# Altium PCB Input Cover Flex.PcbDoc
Units mil, origin at the board's own origin, x right, y up, seen from the top; angles counter-clockwise.
Board outline 1413.39 x 1384.84 mil, 2 copper layers (Top Layer, Bottom Layer); 2 components, 50 nets, 100 pads, 100 vias.
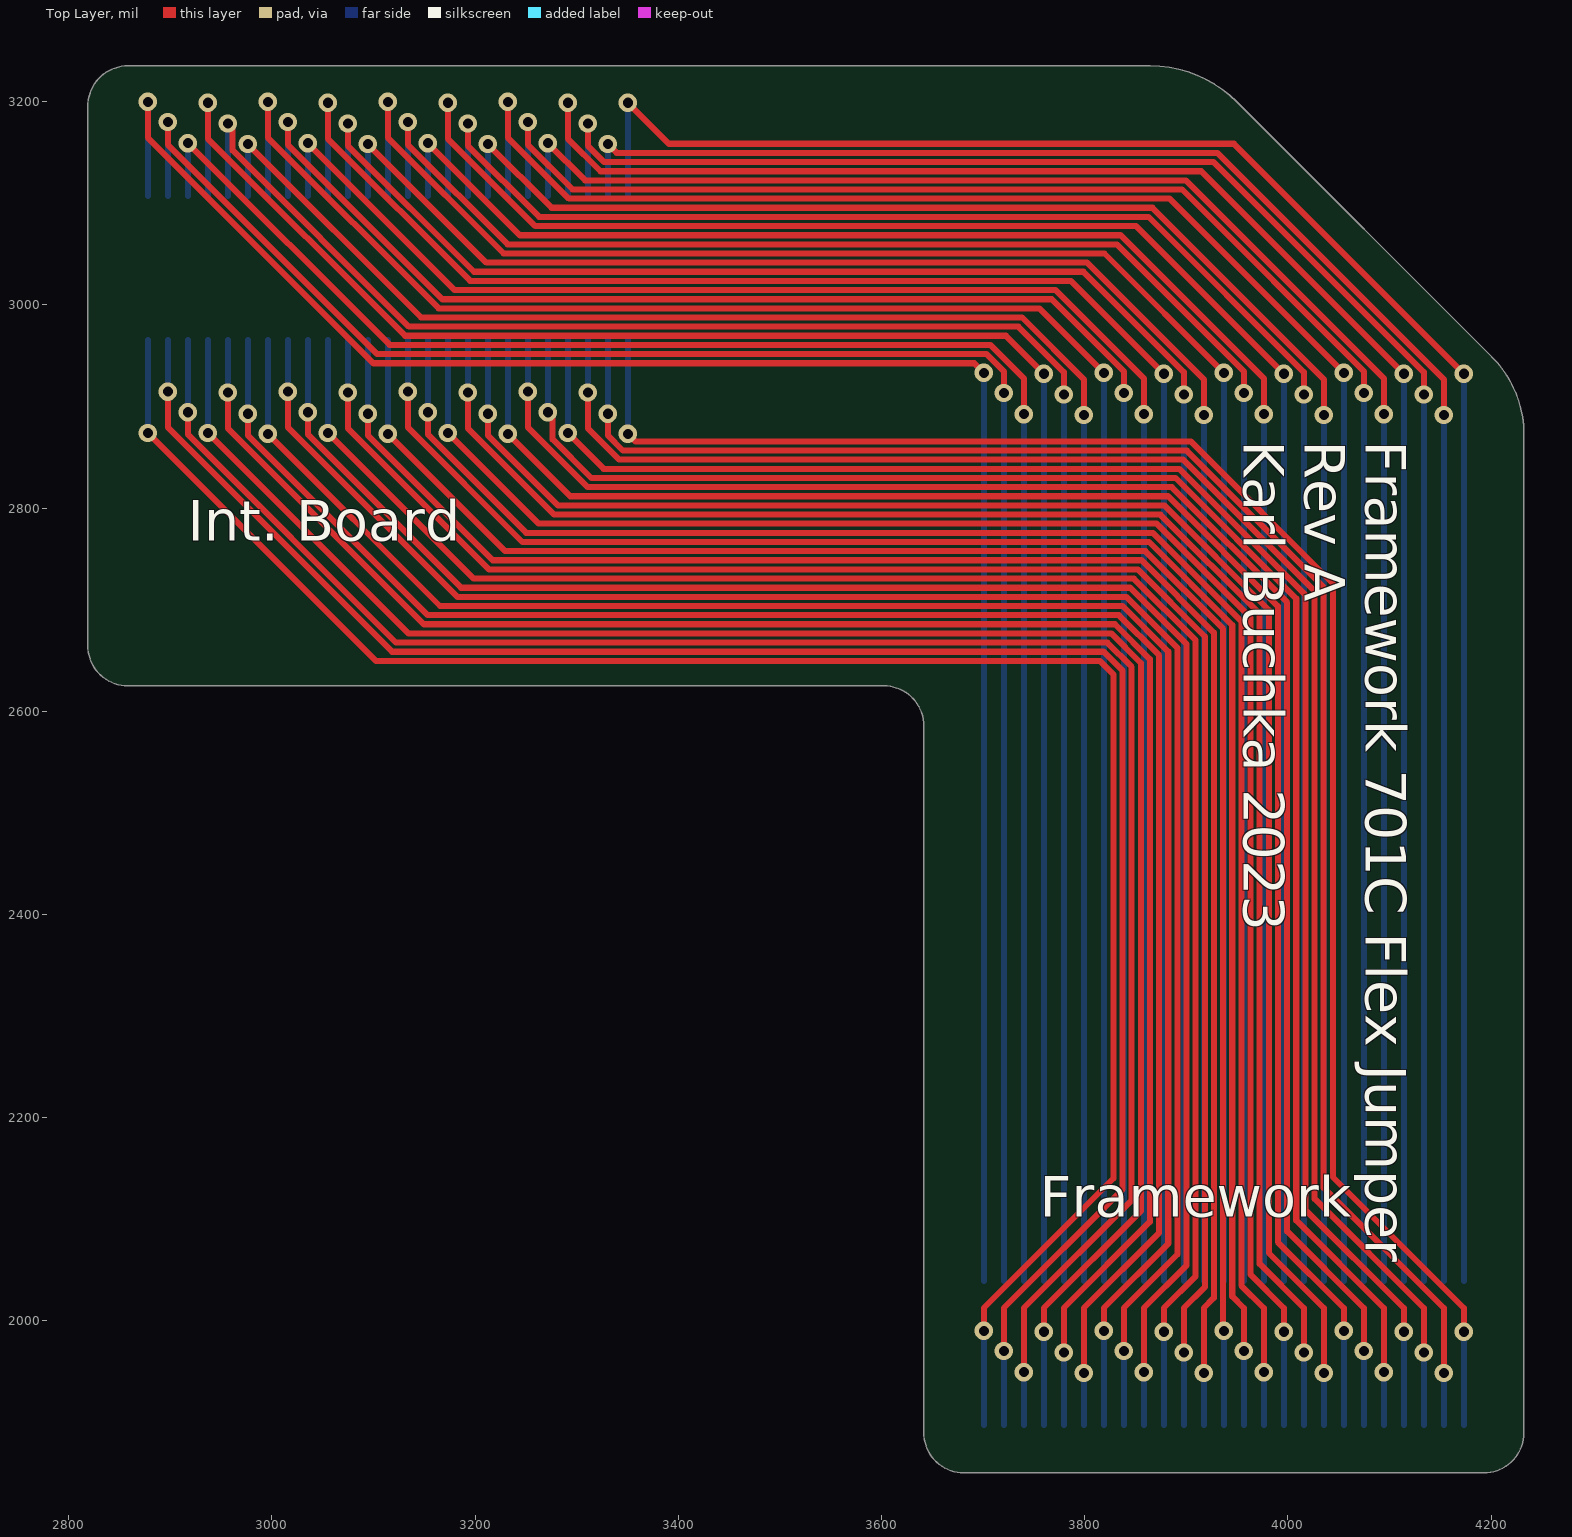
[diagram p0: Top Layer view]
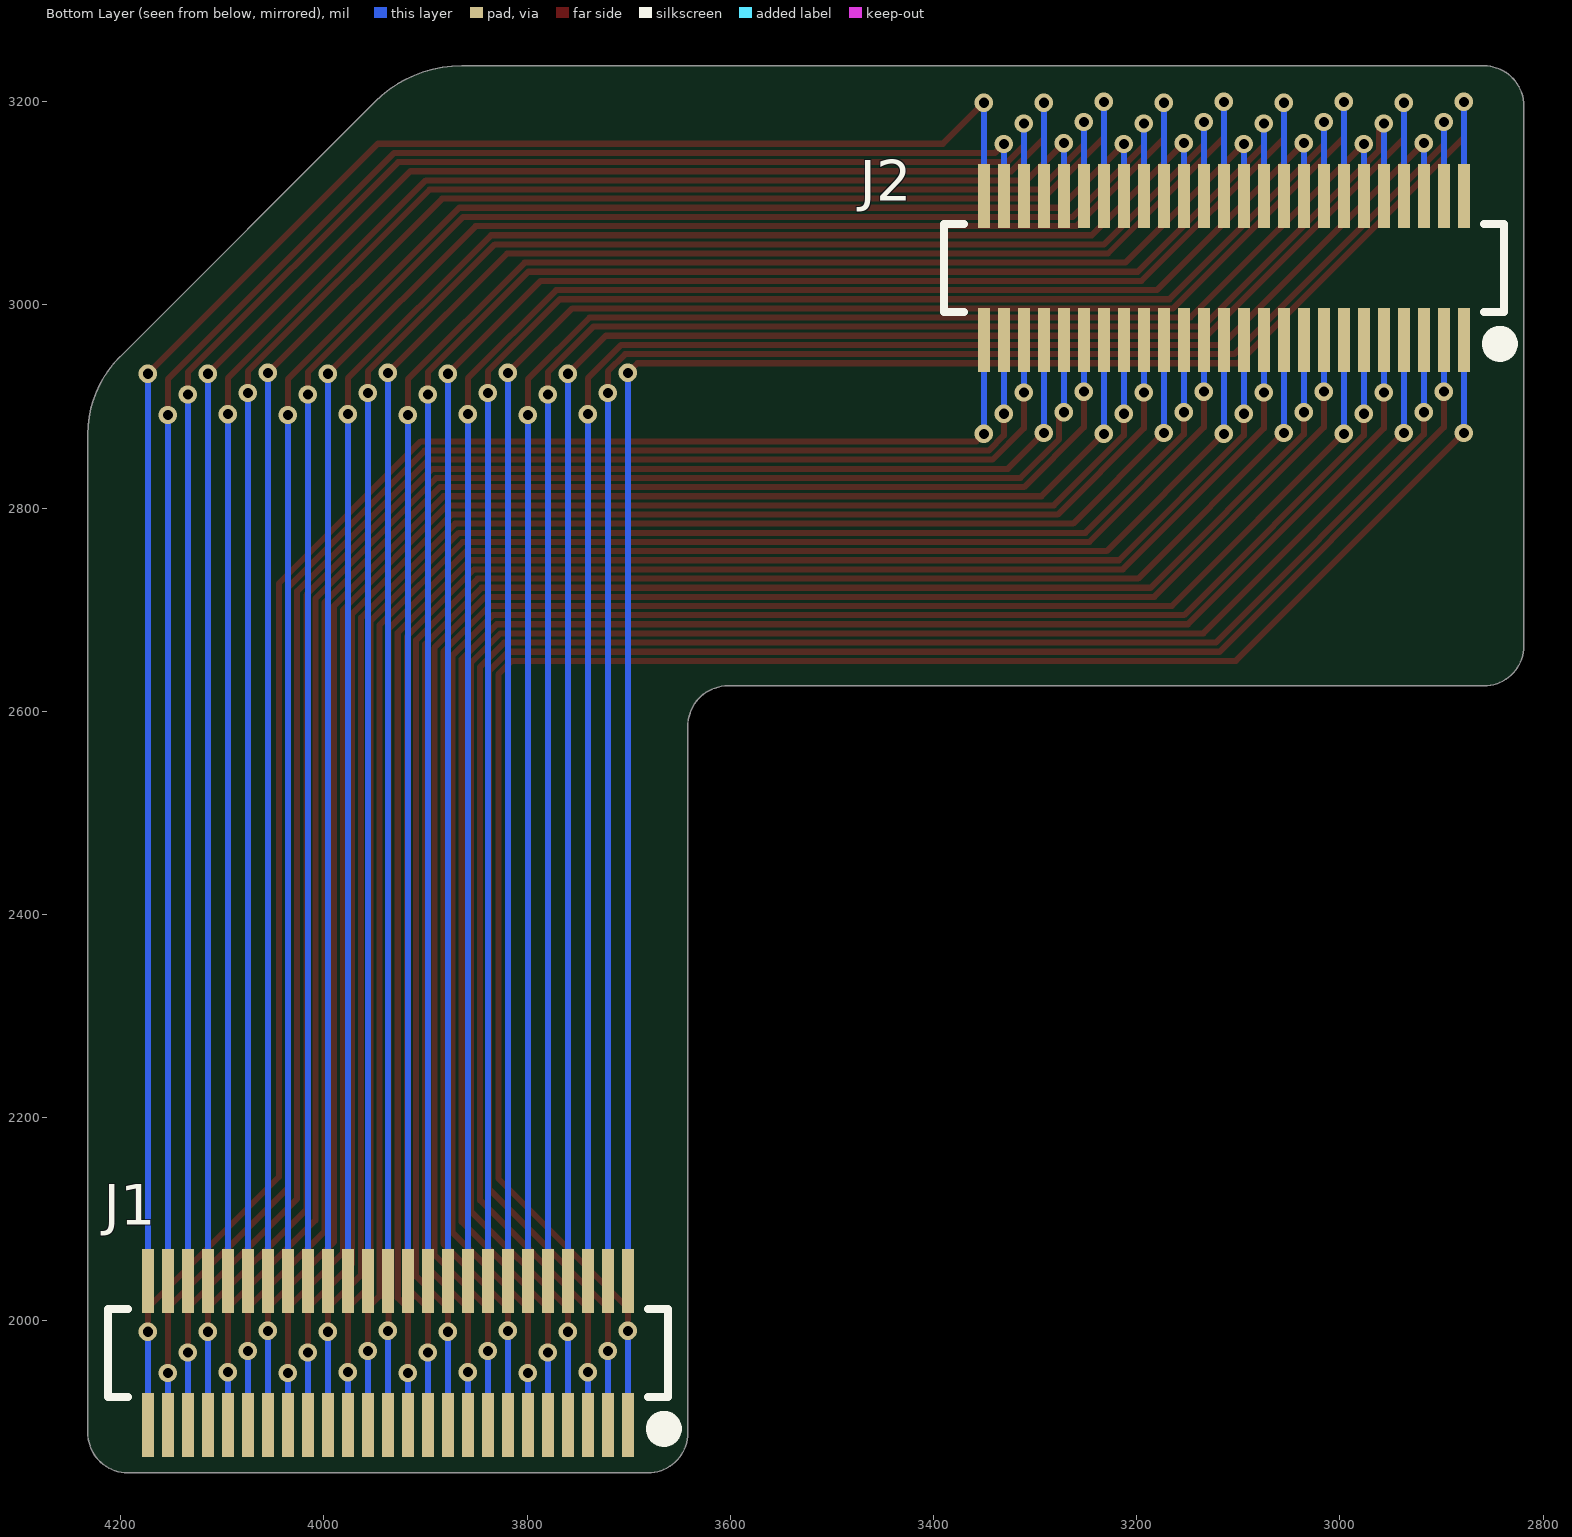
[diagram p1: Bottom Layer view, seen from below]

## Layer stack, top to bottom
Top Solder: solder mask 0.4, Solder Resist, Dk 3.5
Top Layer: signal copper 1.4
Dielectric 1: dielectric 12.6, FR-4, Dk 4.8
Bottom Layer: signal copper 1.4
Bottom Solder: solder mask 0.4, Solder Resist, Dk 3.5

## Board outline
2818.9,2664.37 ccw(c2858.27,2664.37) 2858.27,2625 3602.36,2625 cw(c3602.36,2585.63) 3641.73,2585.63 3641.73,1889.76 ccw(c3681.1,1889.76) 3681.1,1850.39 4192.91,1850.39 ccw(c4192.91,1889.76) 4232.28,1889.76 4232.28,2872.78 ccw(c4124.75,2872.78) 4200.79,2948.82 3949.73,3199.88 ccw(c3864.37,3114.53) 3864.37,3235.24 2858.27,3235.24 ccw(c2858.27,3195.87) 2818.9,3195.87

## Design rules (kind name [scope] priority, off if disabled: settings)
Clearance [All] p1: gap=3 ignorepadtopadclearanceinfootprint=FALSE
PolygonConnect [All] p1: connectstyle=Relief reliefconductorwidth=10 reliefentries=4 polygonreliefangle="90 Angle" airgapwidth=10
RoomDefinition "Input Cover Flex" [InComponentClass('Input Cover Flex')] p1 off: confinementstyle=ConfineIn formatcopy=TRUE lockcomponents=FALSE outline 1109.13,1088.78 6595,1088.78 6595,4325 1109.13,4325
RoutingVias [All] p1: holewidth=8 width=16 viastyle="Through Hole" minholewidth=6 minwidth=14 maxholewidth=10 maxwidth=18
SolderMaskExpansion [All] p1: expansion=4
Width [All] p1: maxlimit=10 minlimit=6 preferedwidth=8 minimp=50.000000 maximp=50.000000 favimp=50.000000
30 further rules are at their usual default settings.

## Components (designator, comment, footprint, x,y, rotation, side; value= is the part's Value field where it differs from the comment)
J1 "10156001-051100LF" 10156001-051100LF 3937.01,1968.5 r0 bottom
J2 "10156001-051100LF" 10156001-051100LF 3114.17,3036.42 r0 bottom

## Footprints (in the part's own frame and the unit in brackets; to place one, negate y for a bottom-side part, rotate by r counter-clockwise, add the part's x,y. Pads: shape width x height; smd on the part's side, far side on the other; paste and mask are expansions set on the pad)
10156001-051100LF [mm]
  rect 0.3x1.6 smd: 1(-6,1.8) 2(-6,-1.8) 3(-5.5,1.8) 4(-5.5,-1.8) 5(-5,1.8) 6(-5,-1.8) 7(-4.5,1.8) 8(-4.5,-1.8) 9(-4,1.8) 10(-4,-1.8) 11(-3.5,1.8) 12(-3.5,-1.8) 13(-3,1.8) 14(-3,-1.8) 15(-2.5,1.8) 16(-2.5,-1.8) 17(-2,1.8) 18(-2,-1.8) 19(-1.5,1.8) 20(-1.5,-1.8) 21(-1,1.8) 22(-1,-1.8) 23(-0.5,1.8) 24(-0.5,-1.8) 25(0,1.8) 26(0,-1.8) 27(0.5,1.8) 28(0.5,-1.8) 29(1,1.8) 30(1,-1.8) 31(1.5,1.8) 32(1.5,-1.8) 33(2,1.8) 34(2,-1.8) 35(2.5,1.8) 36(2.5,-1.8) 37(3,1.8) 38(3,-1.8) 39(3.5,1.8) 40(3.5,-1.8) 41(4,1.8) 42(4,-1.8) 43(4.5,1.8) 44(4.5,-1.8) 45(5,1.8) 46(5,-1.8) 47(5.5,1.8) 48(5.5,-1.8) 49(6,1.8) 50(6,-1.8)
  silkscreen extent -7.1,-1.1 7,2.1, body extent -7.17,-2.3 7.17,2.3, height 2.79

## Via types
v1: diameter 18, hole 10, Top Layer to Bottom Layer, 100 vias

## Nets (pads, with @x,y where several pads share a name; then routed paths per layer and width w, separated by ;. In a path a pad name is that pad's centre, name@x,y a point inside that pad or via, vN(x,y) a via of type N, cw(c..) or ccw(c..) an arc to the next point about the centre after c; other vN are vias at no path point)
5VALW: J1.39 J2.39 | length 1745.6
  Top Layer w6: v1(3251.97,2914.61) 3251.97,2879.41 3310.77,2820.61 3885.79,2820.61 3999.27,2707.13 3999.27,2088.17 4074.8,2012.64 v1(4074.8,1970.43)
  Bottom Layer w6: v1(3251.97,2914.61) J2.39 ; J1.39 v1(4074.8,1970.43)
5VS: J1.38 J2.38 | length 1940.2
  Top Layer w6: v1(3232.28,3199.8) 3232.28,3164.6 3292.33,3104.55 3883.64,3104.55 v1(4055.12,2933.07)
  Bottom Layer w6: J2.38 v1(3232.28,3199.8) ; J1.38 v1(4055.12,2933.07)
CAPS_N: J1.28 J2.28 | length 1905.7
  Top Layer w6: v1(3133.86,3180.08) 3133.86,3157.64 3231.95,3059.55 3831.74,3059.55 3956.69,2934.6 v1(3956.69,2913.35)
  Bottom Layer w6: J2.28 v1(3133.86,3180.08) ; J1.28 3956.69,2699.37 v1(3956.69,2913.35)
CAPS_P: J1.27 J2.27 | length 1770
  Top Layer w6: v1(3133.86,2914.61) 3133.86,2879.41 3246.66,2766.61 3863.42,2766.61 3945.27,2684.76 3945.27,2024.06 3956.69,2012.64 v1(3956.69,1970.43)
  Bottom Layer w6: v1(3133.86,2914.61) J2.27 ; J1.27 v1(3956.69,1970.43)
FPR_CTRL: J1.43 J2.43 | length 1740.6
  Top Layer w6: v1(3291.34,2873.98) 3326.71,2838.61 3893.25,2838.61 4017.27,2714.59 4017.27,2109.54 4114.17,2012.64 v1(4114.17,1989.21)
  Bottom Layer w6: v1(3291.34,2873.98) J2.43 ; J1.43 v1(4114.17,1989.21)
FPR_LED_COM: J1.48 J2.48 | length 1857
  Top Layer w6: v1(3330.71,3158.23) 3339.39,3149.55 3930.69,3149.55 4153.54,2926.7 v1(4153.54,2891.5)
  Bottom Layer w6: J2.48 v1(3330.71,3158.23) ; J1.48 v1(4153.54,2891.5)
FPR_LED_G: J1.47 J2.47 | length 1733.9
  Top Layer w6: v1(3330.71,2892.76) 3330.71,2871.5 3345.61,2856.61 3900.7,2856.61 4035.27,2722.04 4035.27,2130.91 4153.54,2012.64 v1(4153.54,1948.58)
  Bottom Layer w6: v1(3330.71,2892.76) J2.47 ; J1.47 v1(4153.54,1948.58)
FPR_LED_R: J1.45 J2.45 | length 1733.9
  Top Layer w6: v1(3311.02,2913.66) 3311.02,2878.46 3341.88,2847.61 3896.97,2847.61 4026.27,2718.31 4026.27,2120.23 4133.86,2012.64 v1(4133.86,1968.9)
  Bottom Layer w6: v1(3311.02,2913.66) J2.45 ; J1.45 v1(4133.86,1968.9)
FPR_LED_W: J1.46 J2.46 | length 1902.6
  Top Layer w6: v1(3311.02,3178.54) 3311.02,3156.7 3327.17,3140.55 3926.96,3140.55 4133.86,2933.65 v1(4133.86,2911.81)
  Bottom Layer w6: J2.46 v1(3311.02,3178.54) ; J1.46 v1(4133.86,2911.81)
GND1: J1.26 J2.26 | length 1940.2
  Top Layer w6: v1(3114.17,3199.8) 3114.17,3164.6 3228.22,3050.55 3819.53,3050.55 v1(3937.01,2933.07)
  Bottom Layer w6: J2.26 v1(3114.17,3199.8) ; J1.26 v1(3937.01,2933.07)
GND2: J1.1 J2.1 | length 1931.8
  Top Layer w6: v1(2877.95,2873.98) 3102.32,2649.61 3814.96,2649.61 3828.27,2636.3 3828.27,2140.12 3700.79,2012.64 v1(3700.79,1990.16)
  Bottom Layer w6: v1(2877.95,2873.98) J2.1 ; J1.1 v1(3700.79,1990.16)
GND3: J1.29 J2.29 | length 1770
  Top Layer w6: v1(3153.54,2894.29) 3153.54,2872.45 3250.39,2775.61 3867.15,2775.61 3954.27,2688.49 3954.27,2034.75 3976.38,2012.64 v1(3976.38,1949.53)
  Bottom Layer w6: v1(3153.54,2894.29) J2.29 ; J1.29 v1(3976.38,1949.53)
GND4: J1.31 J2.31 | length 1765.1
  Top Layer w6: v1(3173.23,2873.98) 3262.6,2784.61 3870.88,2784.61 3963.27,2692.22 3963.27,2045.43 3996.06,2012.64 v1(3996.06,1989.21)
  Bottom Layer w6: v1(3173.23,2873.98) J2.31 ; J1.31 v1(3996.06,1989.21)
GND5: J1.33 J2.33 | length 1758.4
  Top Layer w6: v1(3192.91,2913.66) 3192.91,2878.46 3277.77,2793.61 3874.61,2793.61 3972.27,2695.95 3972.27,2056.12 4015.75,2012.64 v1(4015.75,1968.9)
  Bottom Layer w6: v1(3192.91,2913.66) J2.33 ; J1.33 v1(4015.75,1968.9)
GND6: J1.41 J2.41 | length 1745.6
  Top Layer w6: v1(3271.65,2894.29) 3276.34,2889.61 3276.34,2867.76 3314.5,2829.61 3889.52,2829.61 4008.27,2710.86 4008.27,2098.86 4094.49,2012.64 v1(4094.49,1949.53)
  Bottom Layer w6: v1(3271.65,2894.29) J2.41 ; J1.41 v1(4094.49,1949.53)
GND7: J1.49 J2.49 | length 1728.9
  Top Layer w6: v1(3350.39,2873.03) 3357.82,2865.61 3904.43,2865.61 4044.27,2725.77 4044.27,2141.6 4173.23,2012.64 v1(4173.23,1989.21)
  Bottom Layer w6: v1(3350.39,2873.03) J2.49 ; J1.49 v1(4173.23,1989.21)
KBL_P_1: J1.30 J2.30 | length 1858.9
  Top Layer w6: v1(3153.54,3159.17) 3244.17,3068.55 3835.47,3068.55 3976.38,2927.64 v1(3976.38,2892.44)
  Bottom Layer w6: J2.30 v1(3153.54,3159.17) ; J1.30 v1(3976.38,2892.44)
KBL_P_2: J1.32 J2.32 | length 1938.3
  Top Layer w6: v1(3173.23,3198.86) 3173.23,3163.66 3259.33,3077.55 3850.64,3077.55 v1(3996.06,2932.13)
  Bottom Layer w6: J2.32 v1(3173.23,3198.86) ; J1.32 v1(3996.06,2932.13)
KSI0: J1.2 J2.2 | length 1940.2
  Top Layer w6: v1(2877.95,3199.8) 2877.95,3164.6 3100,2942.55 3691.31,2942.55 v1(3700.79,2933.07)
  Bottom Layer w6: J2.2 v1(2877.95,3199.8) ; J1.2 v1(3700.79,2933.07)
KSI1: J1.3 J2.3 | length 1915.7
  Top Layer w6: v1(2897.64,2914.61) 2897.64,2879.41 3118.44,2658.61 3818.69,2658.61 3837.27,2640.03 3837.27,2129.43 3720.47,2012.64 v1(3720.47,1970.43)
  Bottom Layer w6: v1(2897.64,2914.61) J2.3 ; J1.3 v1(3720.47,1970.43)
KSI2: J1.4 J2.4 | length 1905.7
  Top Layer w6: v1(2897.64,3180.08) 2897.64,3157.64 3103.73,2951.55 3703.52,2951.55 3720.47,2934.6 v1(3720.47,2913.35)
  Bottom Layer w6: J2.4 v1(2897.64,3180.08) ; J1.4 v1(3720.47,2913.35)
KSI3: J1.5 J2.5 | length 1906.8
  Top Layer w6: v1(2917.32,2894.29) 2917.32,2872.45 3122.16,2667.61 3822.42,2667.61 3846.27,2643.76 3846.27,2118.75 3740.16,2012.64 v1(3740.16,1949.53)
  Bottom Layer w6: v1(2917.32,2894.29) J2.5 ; J1.5 v1(3740.16,1949.53)
KSI4: J1.6 J2.6 | length 1858.9
  Top Layer w6: v1(2917.32,3159.17) 3115.94,2960.55 3707.25,2960.55 3740.16,2927.64 v1(3740.16,2892.44)
  Bottom Layer w6: J2.6 v1(2917.32,3159.17) ; J1.6 v1(3740.16,2892.44)
KSI5: J1.7 J2.7 | length 1893
  Top Layer w6: v1(2937.01,2873.98) 3134.38,2676.61 3826.14,2676.61 3855.27,2647.48 3855.27,2108.06 3759.84,2012.64 v1(3759.84,1989.21)
  Bottom Layer w6: v1(2937.01,2873.98) J2.7 ; J1.7 v1(3759.84,1989.21)
KSI6: J1.8 J2.8 | length 1938.3
  Top Layer w6: v1(2937.01,3198.86) 2937.01,3163.66 3131.11,2969.55 3722.42,2969.55 v1(3759.84,2932.13)
  Bottom Layer w6: J2.8 v1(2937.01,3198.86) ; J1.8 v1(3759.84,2932.13)
KSI7: J1.9 J2.9 | length 1877.5
  Top Layer w6: v1(2956.69,2913.66) 2956.69,2878.46 3149.55,2685.61 3829.87,2685.61 3864.27,2651.21 3864.27,2097.38 3779.53,2012.64 v1(3779.53,1968.9)
  Bottom Layer w6: v1(2956.69,2913.66) J2.9 ; J1.9 v1(3779.53,1968.9)
KSO0: J1.10 J2.10 | length 1902.6
  Top Layer w6: v1(2956.69,3178.54) 2961.38,3173.86 2961.38,3152.02 3134.84,2978.55 3734.63,2978.55 3779.53,2933.65 v1(3779.53,2911.81)
  Bottom Layer w6: J2.10 v1(2956.69,3178.54) ; J1.10 v1(3779.53,2911.81)
KSO1: J1.11 J2.11 | length 1868.6
  Top Layer w6: v1(2976.38,2892.76) 2976.38,2871.5 3153.27,2694.61 3833.6,2694.61 3873.27,2654.94 3873.27,2086.69 3799.21,2012.64 v1(3799.21,1948.58)
  Bottom Layer w6: v1(2976.38,2892.76) J2.11 ; J1.11 v1(3799.21,1948.58)
KSO2: J1.12 J2.12 | length 1857
  Top Layer w6: v1(2976.38,3158.23) 3147.05,2987.55 3738.36,2987.55 3799.21,2926.7 v1(3799.21,2891.5)
  Bottom Layer w6: J2.12 v1(2976.38,3158.23) ; J1.12 v1(3799.21,2891.5)
KSO3: J1.13 J2.13 | length 1854.8
  Top Layer w6: v1(2996.06,2873.03) 3165.49,2703.61 3837.33,2703.61 3882.27,2658.67 3882.27,2076.01 3818.9,2012.64 v1(3818.9,1990.16)
  Bottom Layer w6: v1(2996.06,2873.03) J2.13 ; J1.13 v1(3818.9,1990.16)
KSO4: J1.14 J2.14 | length 1940.2
  Top Layer w6: v1(2996.06,3199.8) 2996.06,3164.6 3164.11,2996.55 3755.42,2996.55 v1(3818.9,2933.07)
  Bottom Layer w6: J2.14 v1(2996.06,3199.8) ; J1.14 v1(3818.9,2933.07)
KSO5: J1.15 J2.15 | length 1838.1
  Top Layer w6: v1(3015.75,2914.61) 3015.75,2879.41 3182.55,2712.61 3841.06,2712.61 3891.27,2662.39 3891.27,2065.32 3838.58,2012.64 v1(3838.58,1970.43)
  Bottom Layer w6: v1(3015.75,2914.61) J2.15 ; J1.15 v1(3838.58,1970.43)
KSO6: J1.16 J2.16 | length 1905.7
  Top Layer w6: v1(3015.75,3180.08) 3015.75,3157.64 3167.84,3005.55 3767.63,3005.55 3838.58,2934.6 v1(3838.58,2913.35)
  Bottom Layer w6: J2.16 v1(3015.75,3180.08) ; J1.16 3838.58,2073.87 v1(3838.58,2913.35)
KSO7: J1.17 J2.17 | length 1829.3
  Top Layer w6: v1(3035.43,2894.29) 3035.43,2872.45 3186.27,2721.61 3844.78,2721.61 3900.27,2666.12 3900.27,2054.64 3858.27,2012.64 v1(3858.27,1949.53)
  Bottom Layer w6: v1(3035.43,2894.29) J2.17 ; J1.17 v1(3858.27,1949.53)
KSO8: J1.18 J2.18 | length 1858.9
  Top Layer w6: v1(3035.43,3159.17) 3180.06,3014.55 3771.36,3014.55 3858.27,2927.64 v1(3858.27,2892.44)
  Bottom Layer w6: J2.18 v1(3035.43,3159.17) ; J1.18 3858.27,2073.87 v1(3858.27,2892.44)
KSO9: J1.19 J2.19 | length 1815.5
  Top Layer w6: v1(3055.12,2873.98) 3198.49,2730.61 3848.51,2730.61 3909.27,2669.85 3909.27,2043.95 3877.95,2012.64 v1(3877.95,1989.21)
  Bottom Layer w6: v1(3055.12,2873.98) J2.19 ; J1.19 v1(3877.95,1989.21)
KSO10: J1.20 J2.20 | length 1938.3
  Top Layer w6: v1(3055.12,3198.86) 3055.12,3163.66 3195.22,3023.55 3786.53,3023.55 v1(3877.95,2932.13)
  Bottom Layer w6: J2.20 v1(3055.12,3198.86) ; J1.20 v1(3877.95,2932.13)
KSO11: J1.21 J2.21 | length 1799.9
  Top Layer w6: v1(3074.8,2913.66) 3074.8,2878.46 3213.66,2739.61 3852.24,2739.61 3918.27,2673.58 3918.27,2033.27 3897.64,2012.64 v1(3897.64,1968.9)
  Bottom Layer w6: v1(3074.8,2913.66) J2.21 ; J1.21 v1(3897.64,1968.9)
KSO12: J1.22 J2.22 | length 1902.6
  Top Layer w6: v1(3074.8,3178.54) 3074.8,3156.7 3198.95,3032.55 3798.74,3032.55 3897.64,2933.65 v1(3897.64,2911.81)
  Bottom Layer w6: J2.22 v1(3074.8,3178.54) ; J1.22 3897.64,2073.87 v1(3897.64,2911.81)
KSO13: J1.23 J2.23 | length 1791.1
  Top Layer w6: v1(3094.49,2892.76) 3094.49,2871.5 3217.39,2748.61 3855.97,2748.61 3927.27,2677.31 3927.27,2022.58 3917.32,2012.64 v1(3917.32,1948.58)
  Bottom Layer w6: v1(3094.49,2892.76) J2.23 ; J1.23 v1(3917.32,1948.58)
KSO14: J1.24 J2.24 | length 1857
  Top Layer w6: v1(3094.49,3158.23) 3211.17,3041.55 3802.47,3041.55 3917.32,2926.7 v1(3917.32,2891.5)
  Bottom Layer w6: J2.24 v1(3094.49,3158.23) ; J1.24 v1(3917.32,2891.5)
KSO15: J1.25 J2.25 | length 1777.8
  Top Layer w6: v1(3114.17,2873.03) 3229.6,2757.61 3859.7,2757.61 3936.27,2681.03 3936.27,1990.9 v1(3937.01,1990.16)
  Bottom Layer w6: v1(3114.17,2873.03) J2.25 ; J1.25 v1(3937.01,1990.16)
SWITCH: J1.44 J2.44 | length 1938.3
  Top Layer w6: v1(3291.34,3198.86) 3291.34,3163.66 3323.44,3131.55 3914.75,3131.55 v1(4114.17,2932.13)
  Bottom Layer w6: J2.44 v1(3291.34,3198.86) ; J1.44 4114.17,2073.87 v1(4114.17,2932.13)
TP_BOARD_ID: J1.37 J2.37 | length 1753.4
  Top Layer w6: v1(3232.28,2873.03) 3293.71,2811.61 3882.06,2811.61 3990.27,2703.4 3990.27,2077.49 4055.12,2012.64 v1(4055.12,1990.16)
  Bottom Layer w6: v1(3232.28,2873.03) J2.37 ; J1.37 v1(4055.12,1990.16)
TP_INT: J1.35 J2.35 | length 1758.4
  Top Layer w6: v1(3212.6,2892.76) 3212.6,2871.5 3281.5,2802.61 3878.33,2802.61 3981.27,2699.67 3981.27,2066.8 4035.43,2012.64 v1(4035.43,1948.58)
  Bottom Layer w6: v1(3212.6,2892.76) J2.35 ; J1.35 v1(4035.43,1948.58)
TP_SCL: J1.34 J2.34 | length 1902.6
  Top Layer w6: v1(3192.91,3178.54) 3192.91,3156.7 3263.06,3086.55 3862.85,3086.55 4015.75,2933.65 v1(4015.75,2911.81)
  Bottom Layer w6: J2.34 v1(3192.91,3178.54) ; J1.34 v1(4015.75,2911.81)
TP_SDA: J1.36 J2.36 | length 1857
  Top Layer w6: v1(3212.6,3158.23) 3275.28,3095.55 3866.58,3095.55 4035.43,2926.7 v1(4035.43,2891.5)
  Bottom Layer w6: J2.36 v1(3212.6,3158.23) ; J1.36 v1(4035.43,2891.5)
UNUSED1: J1.50 J2.50 | length 1917.6
  Top Layer w6: v1(3350.39,3198.86) 3390.7,3158.55 3946.8,3158.55 v1(4173.23,2932.13)
  Bottom Layer w6: J2.50 v1(3350.39,3198.86) ; J1.50 4173.23,2073.87 v1(4173.23,2932.13)
USBN: J1.40 J2.40 | length 1905.7
  Top Layer w6: v1(3251.97,3180.08) 3251.97,3157.64 3296.06,3113.55 3895.85,3113.55 4074.8,2934.6 v1(4074.8,2913.35)
  Bottom Layer w6: J2.40 v1(3251.97,3180.08) ; J1.40 v1(4074.8,2913.35)
USBP: J1.42 J2.42 | length 1858.9
  Top Layer w6: v1(3271.65,3159.17) 3308.28,3122.55 3899.58,3122.55 4094.49,2927.64 v1(4094.49,2892.44)
  Bottom Layer w6: J2.42 v1(3271.65,3159.17) ; J1.42 v1(4094.49,2892.44)

## Silkscreen, mask and mechanical layers (free items; w line width, h text height)
Top Overlay:
  text "Framework 701C Flex Jumper / Rev A / Karl Buchka 2023" at 3956.69,2866.14 h40 r270
  text "Int. Board" at 2917.32,2767.72 h40
  text "Framework" at 3755.91,2102.36 h40
Board Outline:
  lines w3.94: 3641.73,1889.76 ccw(c3681.1,1889.76) 3681.1,1850.39 ; 3641.73,1890.72 3641.73,2585.63 ccw(c3602.36,2585.63) 3602.36,2625 2858.27,2625 cw(c2858.27,2664.37) 2818.9,2664.37 2818.9,3195.87 cw(c2858.27,3195.87) 2858.27,3235.24 3842.52,3235.24 3864.37,3235.24 cw(c3864.37,3114.53) 3949.73,3199.88 4200.79,2948.82 cw(c4124.75,2872.78) 4232.28,2872.78 4232.28,1890.72 ; 3682.06,1850.39 4191.96,1850.39 ; 4192.91,1850.39 ccw(c4192.91,1889.76) 4232.28,1889.76
Top Stifferners:
  lines w3.94: 3641.73,1889.76 ccw(c3681.1,1889.76) 3681.1,1850.39 ; 3641.73,1890.72 3641.73,2047.24 cw(c3681.1,2047.24) 3681.1,2086.61 ; 3682.06,1850.39 4191.96,1850.39 ; 3682.06,2086.61 4191.96,2086.61 ; 4192.91,1850.39 ccw(c4192.91,1889.76) 4232.28,1889.76 ; 4192.91,2086.61 cw(c4192.91,2047.24) 4232.28,2047.24 4232.28,1890.72 ; 2818.9,2880.91 ccw(c2858.27,2880.91) 2858.27,2841.54 3370.08,2841.54 ccw(c3370.08,2880.91) 3409.45,2880.91 3409.45,3195.87 ccw(c3370.08,3195.87) 3370.08,3235.24 2858.27,3235.24 ccw(c2858.27,3195.87) 2818.9,3195.87 2818.9,2880.91
  text "Top Stiffener" at 2874.02,3000 h40
  text "Top Stiffener" at 3696.85,1933.07 h40

## Dimensions
3826.77,3236.22 to 4192.91,1850.39 on Mechanical 1
2818.9,2664.37 to 4232.28,2872.78 on Mechanical 1
3370.08,2880.91 to 3460.7,2790.28 on Top Stifferners
4236.22,2086.61 to 4232.28,1850.39 on Top Stifferners
4232.28,1850.39 to 3641.73,1850.39 on Top Stifferners
2795.28,2842.52 to 2818.9,3236.22 on Top Stifferners
2818.9,3236.22 to 3409.45,3236.22 on Top Stifferners